# EAGLE board box'' (EAGLE 6.4)
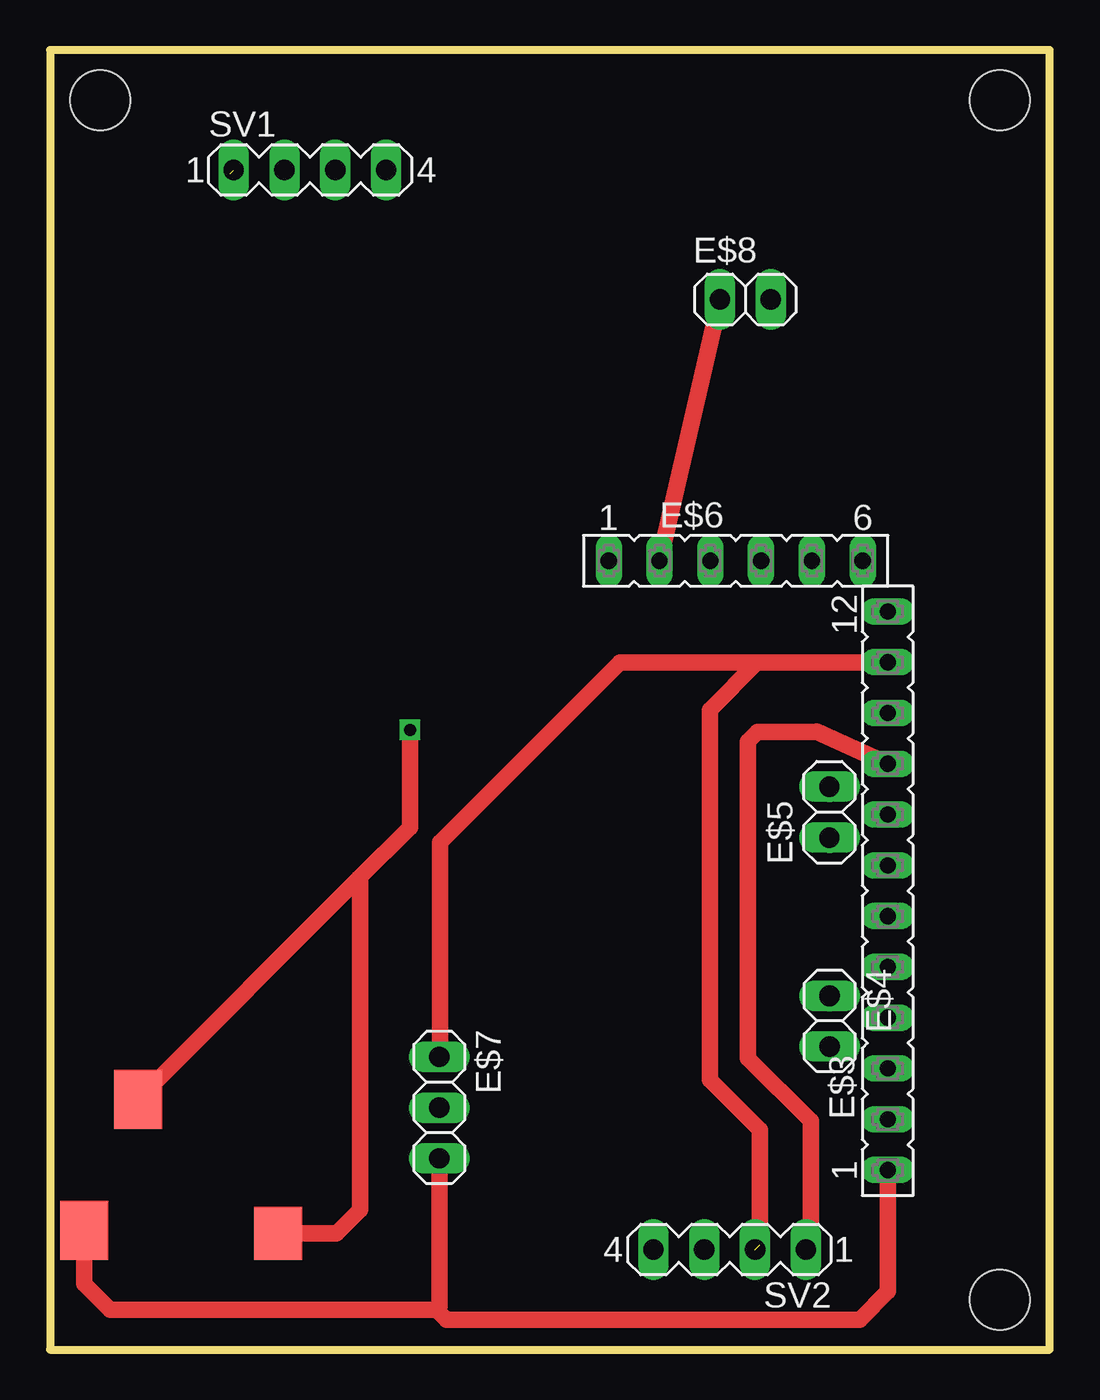
[diagram p0: board, top side]
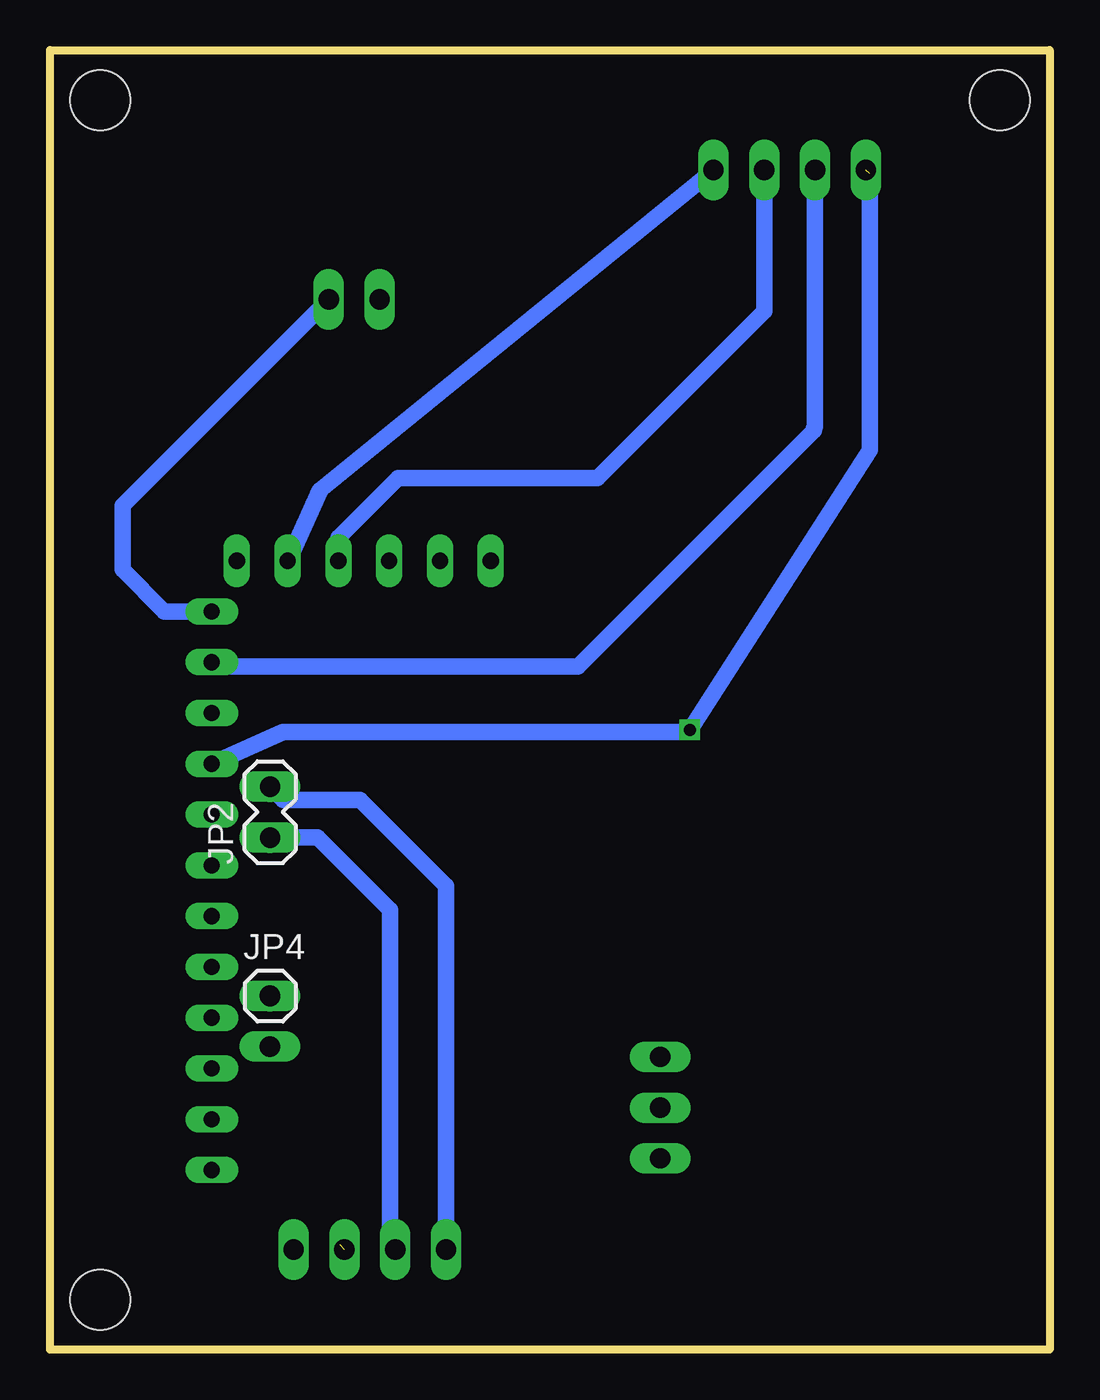
[diagram p1: board, bottom side, seen from below]

Size 50 x 65 mm. Coordinates in mm from the lower left corner, seen from the top.
Outline: 0,0 50,0 50,65 0,65 0,0
Copper layers (1*16): Top 0.035mm / dielectric 1.5mm / Bottom 0.035mm
Design rules "default": minimum track width 10mil, minimum drill 24mil, track to track 8mil, track to pad 8mil, pad to pad 8mil, via to via 8mil, smd to smd 8mil, copper to edge 40mil, drill to drill 8mil, minimum pad ring 10mil, minimum via ring 8mil, stop-mask expansion 4mil, vias tented up to drill 0mil, thermal gap 10mil
Net classes: 0 default: width 0.203 mm; 1 vcc: width 0.254 mm
Holes 3 mm at 47.5,2.5 2.5,62.5 47.5,62.5

## Footprints (pad centres in the part's own frame; a part is rotated, then mirrored left to right if it is on the bottom)
SMDAUDIO = smd 2.4 x 2.95: P$1 1.7,1.475; P$2 4.4,8.025 | smd 2.4 x 2.65: P$3 11.4,1.325
FE12 = drill 0.813 long: 1 -13.97,0; 2 -11.43,0; 3 -8.89,0; 4 -6.35,0; 5 -3.81,0; 6 -1.27,0; 7 1.27,0; 8 3.81,0; 9 6.35,0; 10 8.89,0; 11 11.43,0; 12 13.97,0
1X02 = drill 1.016 long: 1 -1.27,0; 2 1.27,0
FE06 = drill 0.813 long: 1 -6.35,0; 2 -3.81,0; 3 -1.27,0; 4 1.27,0; 5 3.81,0; 6 6.35,0
1X03 = drill 1.016 long: 1 -2.54,0; 2 0,0; 3 2.54,0
1X02' = drill 1.016: 1 0,0; 2 2.54,0
1X01 = drill 1.016: 1 0,0
MA04-1 = drill 1.016 long: 1 -3.81,0; 2 -1.27,0; 3 1.27,0; 4 3.81,0

## Placement (x,y rotation side)
E$1  [SMDAUDIO]  0,4.5 0 top
E$3  [FE12]  41.91,22.95 90 top
E$4  [1X02]  39,16.43 270 top
E$5  [1X02]  38.99,26.88 90 top
E$6  [FE06]  34.3,39.45 0 top
E$7  [1X03]  19.47,12.1 270 top
E$8  [1X02]  34.78,52.52 0 top
JP2  [1X02']  38.99,25.61 90 bottom
JP4  [1X01]  38.99,17.68 0 bottom
SV1  [MA04-1]  13,59 0 top
SV2  [MA04-1]  34,5 180 top

## Library data of the parts
E$1 = audiojack
E$3 E$6 = con-lsta
E$4 E$5 E$7 E$8 = pinhead
JP2 JP4 = SparkFun
SV1 SV2 = con-lstb; OC_FARNELL: unknown; OC_NEWARK: unknown

## Nets
S$1: SV1.4
S$2: E$6.4 SV1.3
S$3: JP2.2 SV2.4
S$4: JP2.1 SV2.3
S$5: E$3.11 SV1.2 SV2.2
S$6: E$1.P$2 E$1.P$3 E$3.9 SV1.1 SV2.1
S$9: E$6.2 E$8.1
S$10: E$1.P$1
S$11: E$3.12 E$8.2

## Tracks (layer width: path | path; a pad name or v marks a point on that pad's centre or on a via)
S$1
  Bottom 0.813: SV1.4 36.5,43 38.1,39.45
S$2
  Bottom 0.813: SV1.3 14.27,51.93 22.61,43.59 32.58,43.59 35.57,40.6 E$6.4
S$3
  Bottom 0.813: JP2.2 38.34,27.5 34.5,27.5 30.19,23.19 SV2.4
S$4
  Bottom 0.813: SV2.3 33,5.27 33,22 36.61,25.61 JP2.1
S$5  (1 unrouted)
  Top 0.406: E$3.11 41.56,34.37 41.57,34.38 E$3.11
  Top 0.813: 35.5,5.23 35.5,11 33,13.5 33,32 35.37,34.37 | 35.37,34.37 41.56,34.37 | 19.5,14.54 19.5,25.37 28.5,34.37 35.37,34.37
  Bottom 0.406: SV1.2 11.5,58.77 | 41.55,34.74 E$3.11
  Bottom 0.813: SV1.2 11.73,46.14 11.79,46.08 11.79,45.97 23.59,34.17 41.7,34.17 E$3.11
S$6  (via drill 0.6)  (1 unrouted)
  Top 0.406: 15.5,23.5 15.44,23.56
  Top 0.813: E$1.P$2 15.44,23.56 18,26.12 v18,31 | E$1.P$3 14.32,5.82 15.5,7 15.5,23.5 | SV2.1 38.06,5.25 38.06,11.44 34.92,14.57 34.92,30.42 35.38,30.88 38.35,30.88 38.33,30.9 E$3.9
  Bottom 0.813: 9,58.81 9,45 v18,31 18,30.88 38.35,30.88 E$3.9
S$9
  Top 0.813: E$8.1 E$6.2
S$10
  Top 0.406: 19.35,2 19.49,2.14 | 19.49,9.45 19.5,9.46
  Top 0.813: E$1.P$1 1.7,3.3 3,2 19.35,2 19.85,1.5 40.5,1.5 41.91,2.91 41.91,8.97 | 19.49,2.14 19.49,9.45
S$11
  Bottom 0.813: E$3.12 44.28,36.92 46.37,39 46.37,42.2 E$8.2